# Altium PCB 智能实验室传感器底板.PcbDoc
Units mm, origin at the board's own origin, x right, y up, seen from the top; angles counter-clockwise.
Board outline 97 x 67 mm, 4 copper layers (Top Layer, Internal Plane 1, Internal Plane 2, Bottom Layer); 7 components, 11 nets, 52 pads, 0 vias.
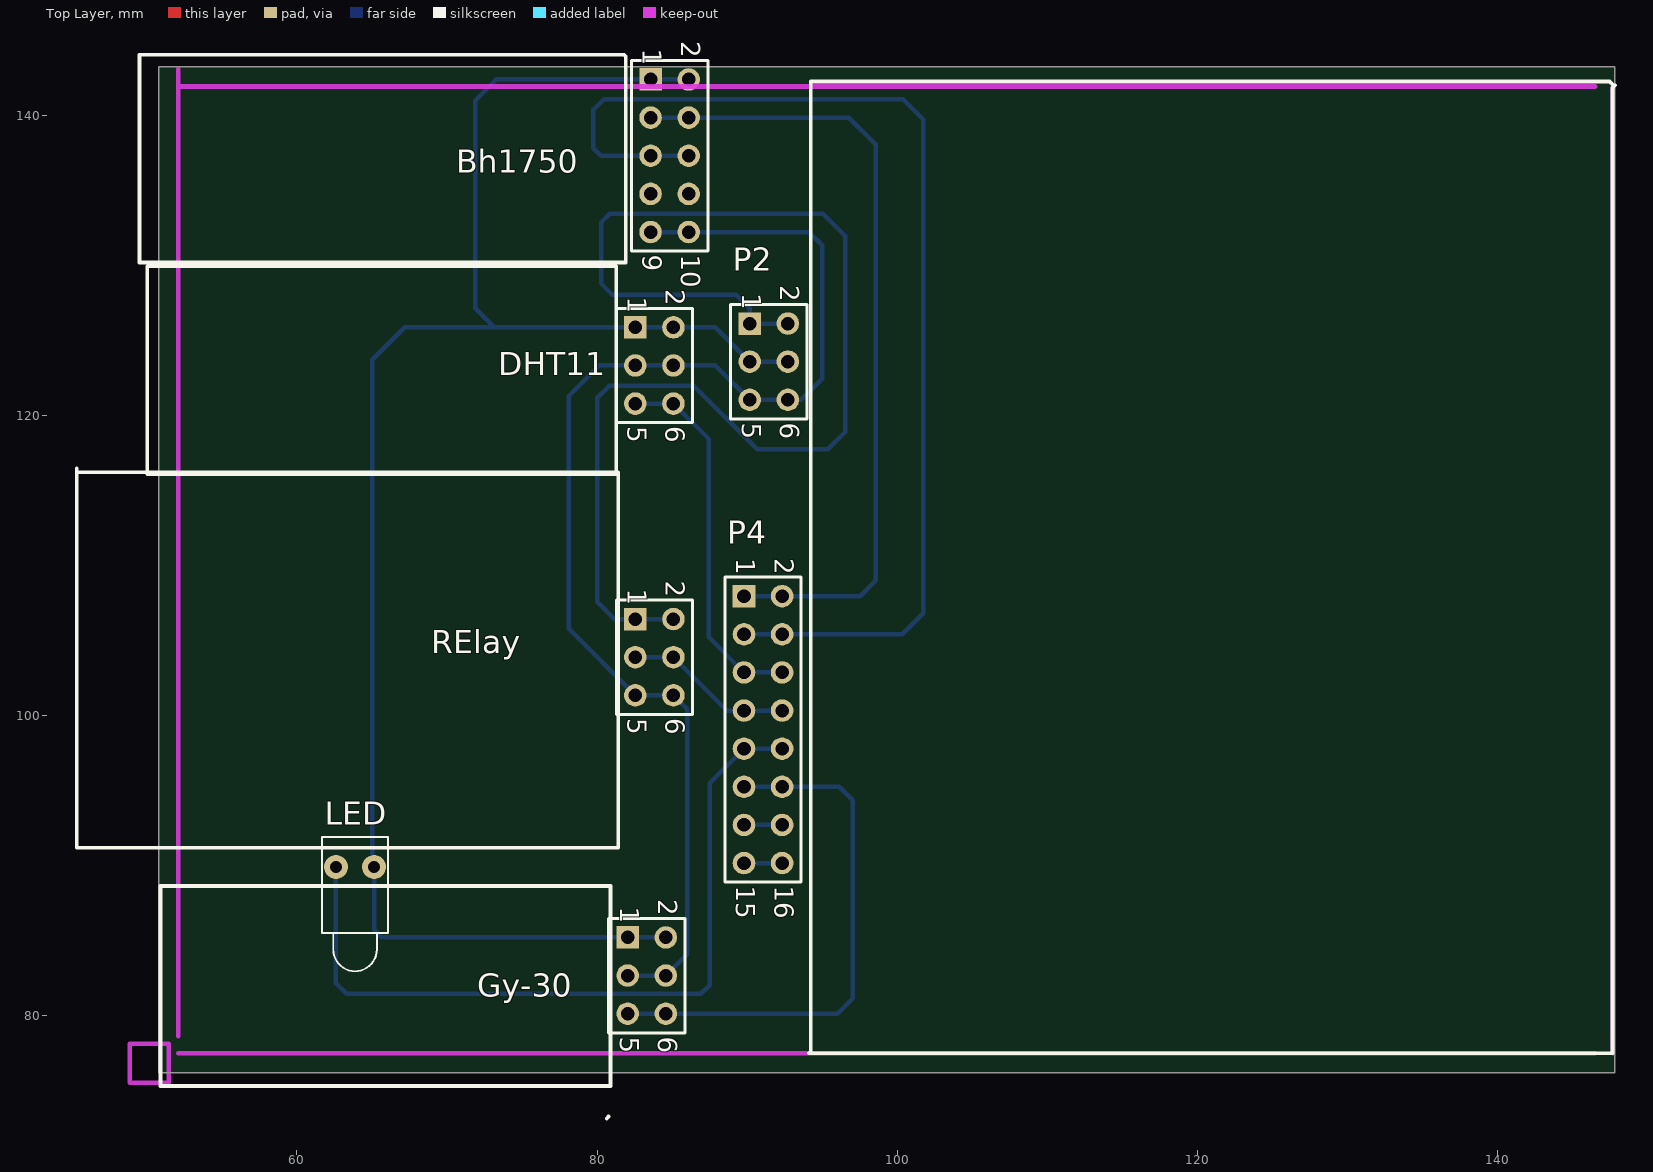
[diagram p0: Top Layer view]
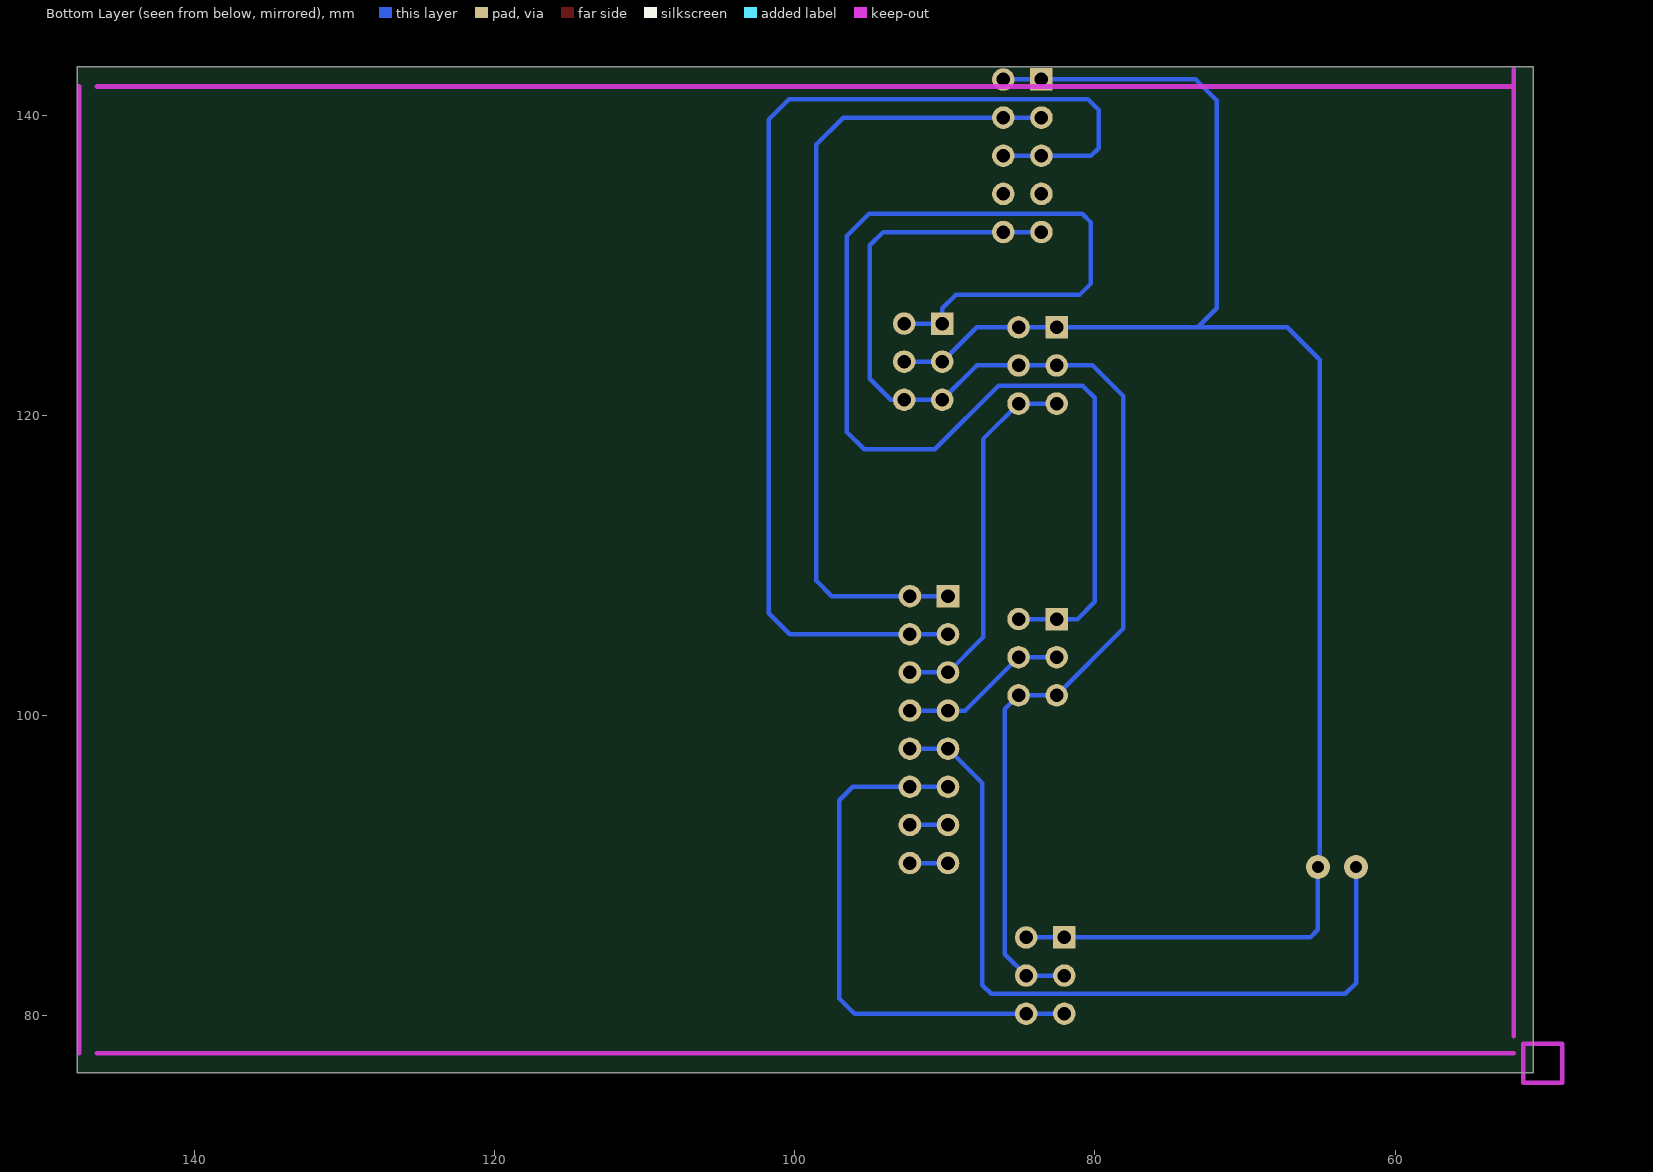
[diagram p1: Bottom Layer view, seen from below]
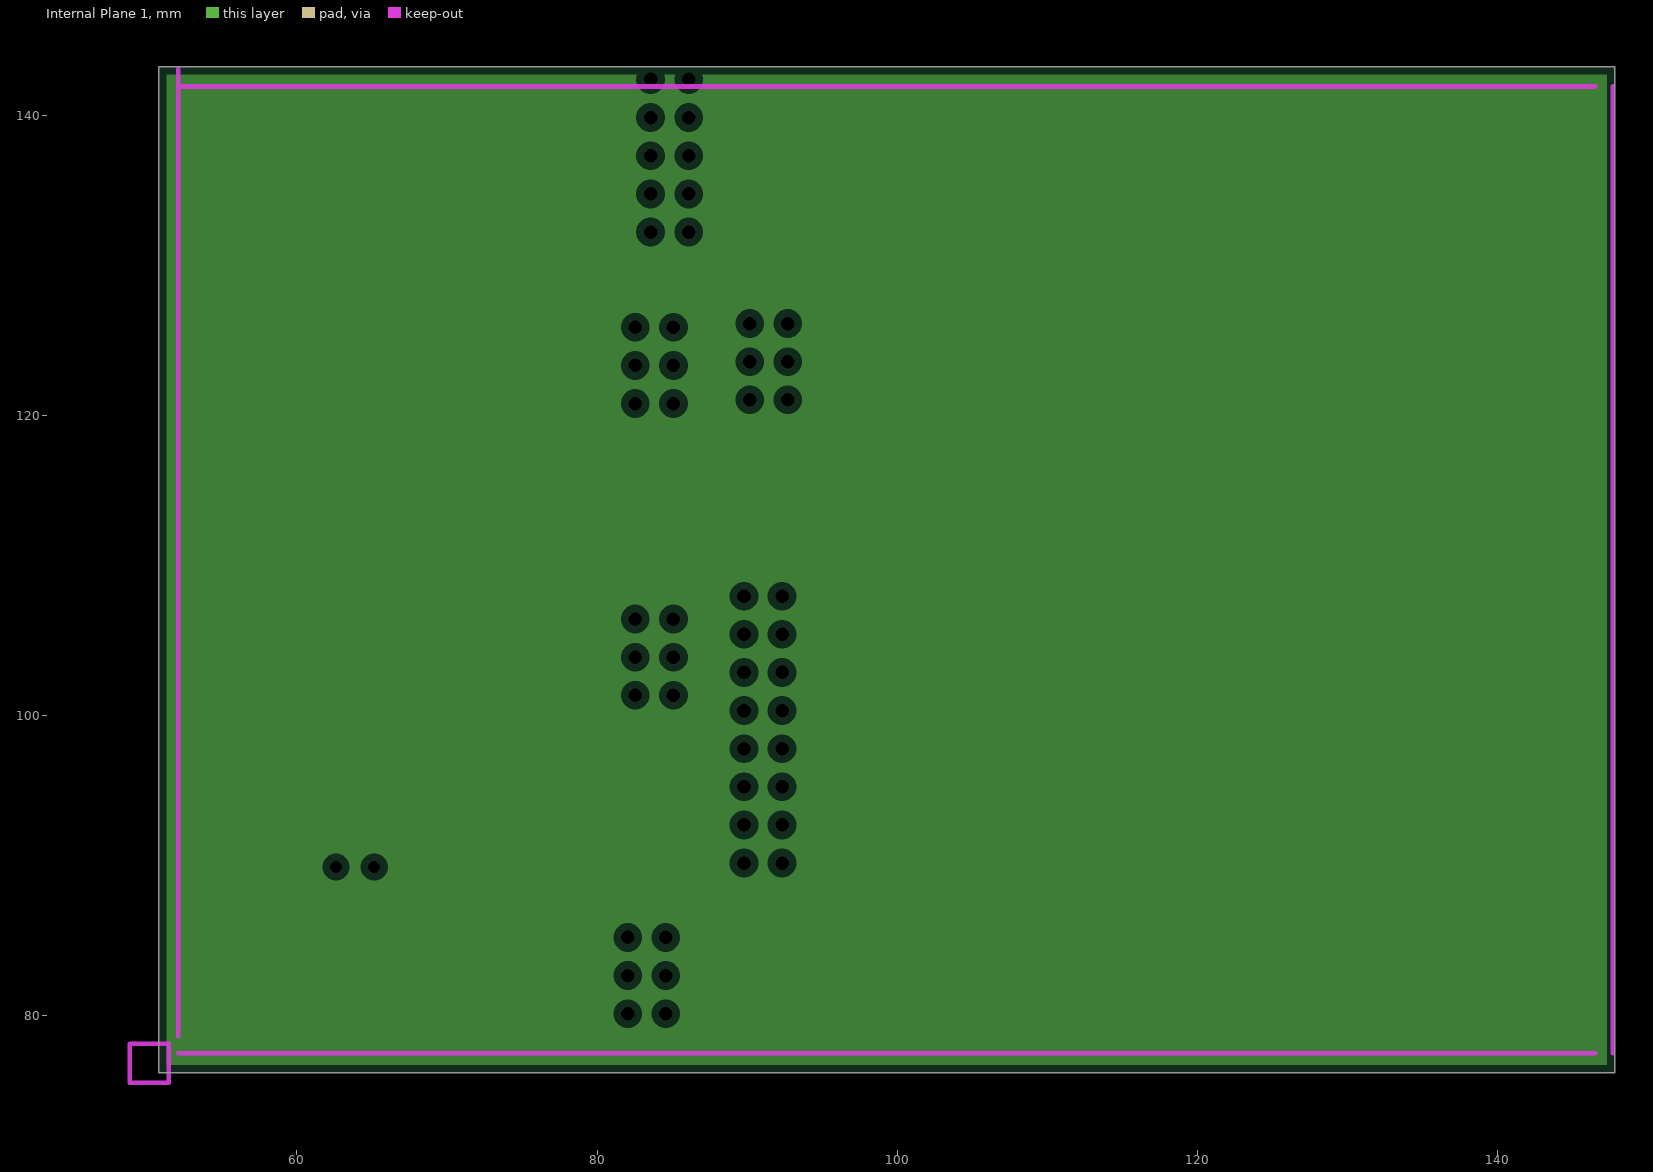
[diagram p2: Internal Plane 1, clearances drawn from the general rule]
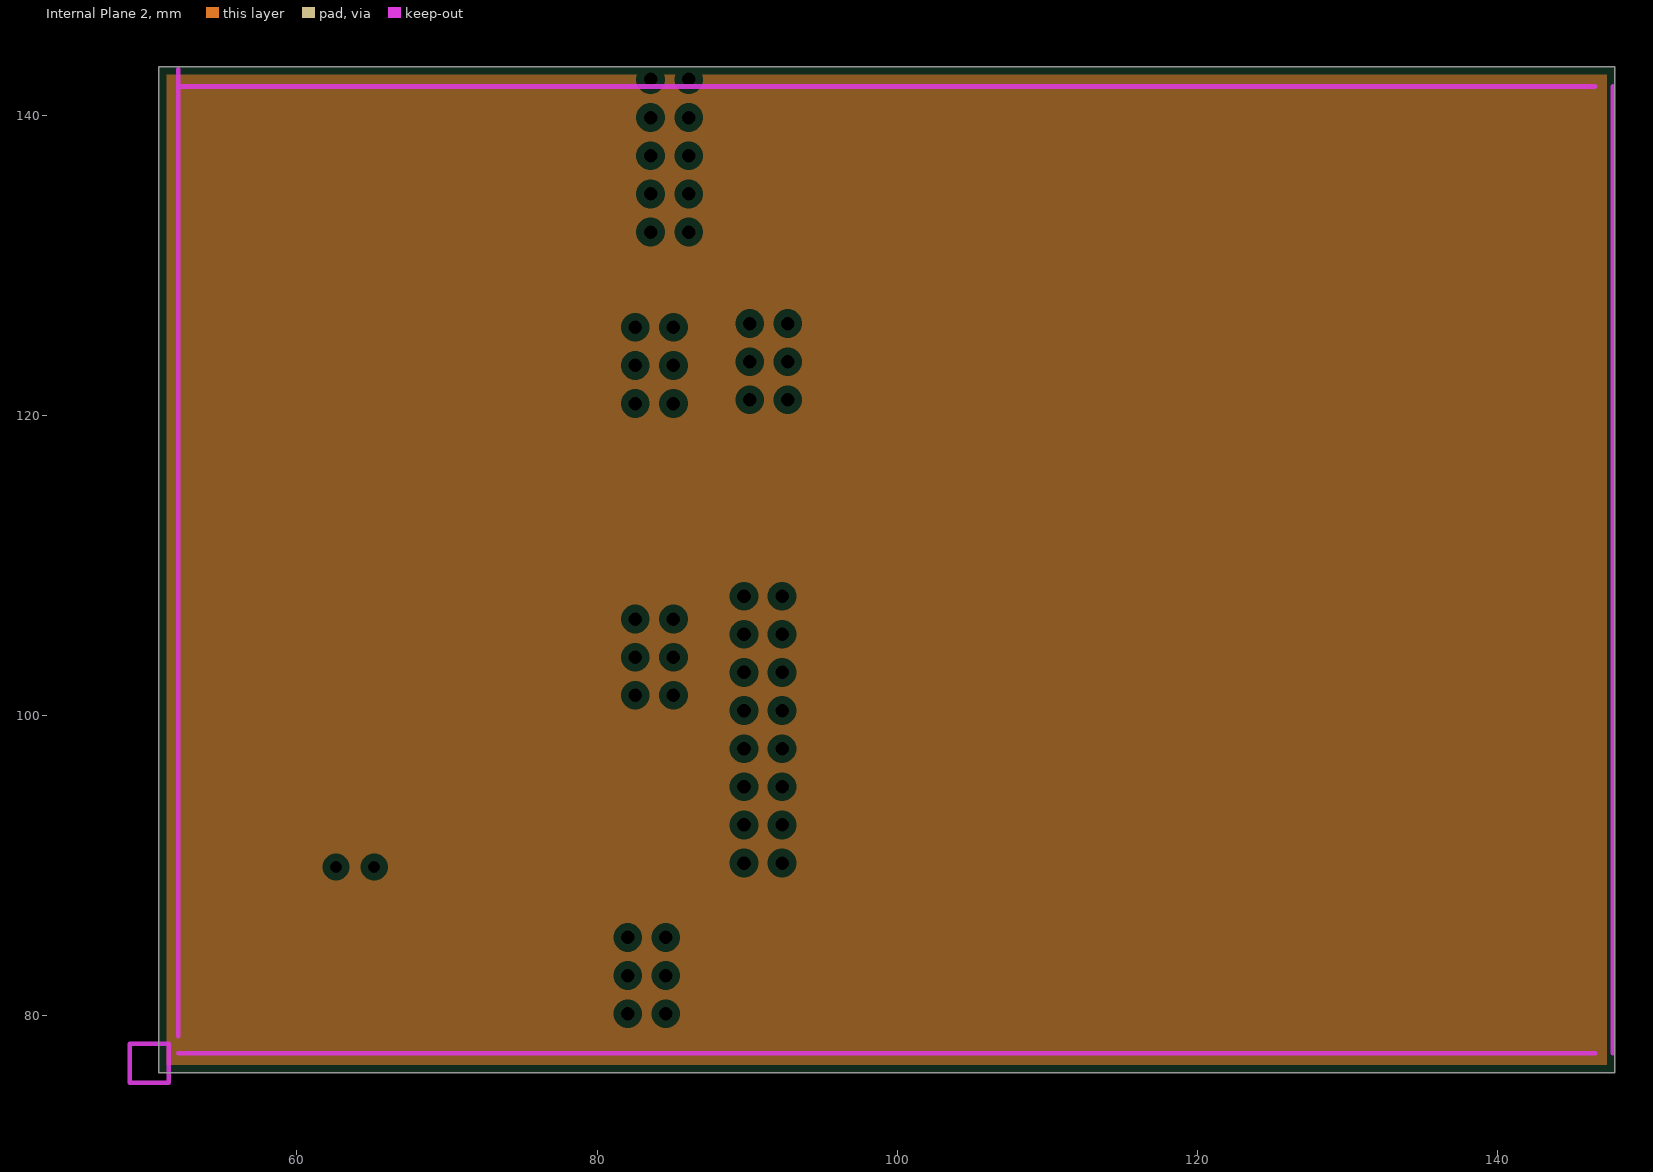
[diagram p3: Internal Plane 2, clearances drawn from the general rule]

## Layer stack, top to bottom
Top Layer: signal copper 0.0356
Dielectric: dielectric 0.32, FR-4, Dk 4.8
Internal Plane 1: plane copper 0.0356
Dielectric: dielectric 0.32, FR-4, Dk 4.8
Internal Plane 2: plane copper 0.0356
Dielectric: dielectric 0.32, FR-4, Dk 4.8
Bottom Layer: signal copper 0.0356

## Board outline
50.8,76.2 147.8,76.2 147.8,143.2 50.8,143.2

## Design rules (kind name [scope] priority, off if disabled: settings)
Clearance [All] p1: gap=0.3
PlaneClearance [All] p1: clearance=0.508
PlaneConnect [All] p1: planeconnectstyle=Relief reliefexpansion=0.508 reliefentries=4 reliefconductorwidth=0.254 reliefairgap=0.254
PolygonConnect [All] p1: connectstyle=Relief reliefconductorwidth=0.254 reliefentries=4 polygonreliefangle="90 Angle" airgapwidth=0.254
RoutingVias [All] p1: holewidth=0.8 width=1.6 viastyle="Through Hole" minholewidth=0.711 minwidth=1.27 maxholewidth=0.711 maxwidth=1.27
SolderMaskExpansion [All] p1: expansion=0.102
Width [All] p1: maxlimit=0.3 minlimit=0.3 preferedwidth=0.3
26 further rules are at their usual default settings.

## Components (designator, comment, footprint, x,y, rotation, side; value= is the part's Value field where it differs from the comment)
Bh1750 "Header 5X2" HDR2X5 83.566,142.367 r270 top
DHT11 "Header 3X2" HDR2X3 82.55,125.857 r270 top
Gy-30 "Header 3X2" HDR2X3 82.042,85.217 r270 top
LED "LED1" LED-1 63.881,89.916 r270 top
P2 "Header 3X2" HDR2X3 90.17,126.111 r270 top
P4 "Header 8X2" HDR2X8 89.789,107.95 r270 top
RElay "Header 3X2" HDR2X3 82.55,106.426 r270 top

## Footprints (in the part's own frame and the unit in brackets; to place one, negate y for a bottom-side part, rotate by r counter-clockwise, add the part's x,y. Pads: shape width x height; smd on the part's side, far side on the other; paste and mask are expansions set on the pad)
HDR2X3 [mm] "Connector; Header; 3x2 Position"
  rect 1.5x1.5 hole 0.9: 1(0,0)
  round 1.5 hole 0.9: 2(0,2.54) 3(2.54,0) 4(2.54,2.54) 5(5.08,0) 6(5.08,2.54)
  silkscreen extent -1.27,-1.27 6.35,3.81
HDR2X5 [mm] "Connector; Header; 5x2 Position"
  rect 1.5x1.5 hole 0.9: 1(0,0)
  round 1.5 hole 0.9: 2(0,2.54) 3(2.54,0) 4(2.54,2.54) 5(5.08,0) 6(5.08,2.54) 7(7.62,0) 8(7.62,2.54) 9(10.16,0) 10(10.16,2.54)
  silkscreen extent -1.27,-1.27 11.43,3.81
HDR2X8 [mm] "Connector; Header; 8x2 Position"
  rect 1.5x1.5 hole 0.9: 1(0,0)
  round 1.5 hole 0.9: 2(0,2.54) 3(2.54,0) 4(2.54,2.54) 5(5.08,0) 6(5.08,2.54) 7(7.62,0) 8(7.62,2.54) 9(10.16,0) 10(10.16,2.54) 11(12.7,0) 12(12.7,2.54) 13(15.24,0) 14(15.24,2.54) 15(17.78,0) 16(17.78,2.54)
  silkscreen extent -1.27,-1.27 19.05,3.81
LED-1 [mm] "LED; 2 Leads"
  round 1.6 hole 0.8: 1(0,1.27) 2(0,-1.27)
  silkscreen extent -2,-2.2 6.95,2.2

## Part data
Bh1750: "Header, 5-Pin, Dual row"
DHT11 Gy-30 P2 RElay: "Header, 3-Pin, Dual row"
LED: "Typical RED GaAs LED"
P4: "Header, 8-Pin, Dual row"

## Nets (pads, with @x,y where several pads share a name; then routed paths per layer and width w, separated by ;. In a path a pad name is that pad's centre, name@x,y a point inside that pad or via, vN(x,y) a via of type N, cw(c..) or ccw(c..) an arc to the next point about the centre after c; other vN are vias at no path point)
GND: Bh1750.9 Bh1750.10 DHT11.3 DHT11.4 Gy-30.3 Gy-30.4 P2.5 P2.6 RElay.5 RElay.6 | length 86.4
  Bottom Layer w0.3: Gy-30.3 Gy-30.4 86.004,84.099 86.004,100.432 RElay.6 RElay.5 78.105,105.791 78.105,121.285 80.137,123.317 DHT11.3 DHT11.4 87.884,123.317 P2.5 P2.6 93.599,121.031 94.996,122.428 94.996,131.318 94.107,132.207 Bh1750.10 Bh1750.9
P1_0: Bh1750.3 Bh1750.4 P4.1 P4.2 | length 54
  Bottom Layer w0.3: Bh1750.3 Bh1750.4 96.774,139.827 98.552,138.049 98.552,108.966 97.536,107.95 P4.2 P4.1
P1_1: Bh1750.5 Bh1750.6 P4.3 P4.4 | length 77.3
  Bottom Layer w0.3: Bh1750.6 Bh1750.5 80.264,137.287 79.756,137.795 79.756,140.335 80.467,141.046 100.381,141.046 101.727,139.7 101.727,106.807 100.33,105.41 P4.4 P4.3
P1_2: DHT11.5 DHT11.6 P4.5 P4.6 | length 24.9
  Bottom Layer w0.3: DHT11.5 DHT11.6 87.452,118.415 87.452,105.207 P4.5 P4.6
P1_3: P4.7 P4.8 RElay.3 RElay.4 | length 11.3
  Bottom Layer w0.3: RElay.3 RElay.4 88.646,100.33 P4.7 P4.8
P1_4: LED.2 P4.9 P4.10 | length 52.4
  Bottom Layer w0.3: LED.2 62.611,82.169 63.322,81.458 86.919,81.458 87.503,82.042 87.503,95.504 P4.9 P4.10
P1_5: Gy-30.5 Gy-30.6 P4.11 P4.12 | length 36.2
  Bottom Layer w0.3: Gy-30.5 Gy-30.6 96.012,80.137 97.028,81.153 97.028,94.361 96.139,95.25 P4.12 P4.11
P1_6: P4.13 P4.14 | length 2.5
  Bottom Layer w0.3: P4.13 P4.14
P1_7: P4.15 P4.16 | length 2.5
  Bottom Layer w0.3: P4.15 P4.16
VCC3.3: Bh1750.1 Bh1750.2 DHT11.1 DHT11.2 Gy-30.1 Gy-30.2 LED.1 P2.3 P2.4 | length 128.5
  Bottom Layer w0.3: LED.1@65.024,89.916 65.024,123.698 67.183,125.857 DHT11.1 DHT11.2 87.884,125.857 P2.3 P2.4 ; LED.1 65.151,85.725 65.659,85.217 Gy-30.1 ; 71.12,85.217 Gy-30.1 ; 73.152,125.857 71.882,127.127 71.882,140.97 73.279,142.367 Bh1750.1 Bh1750.2 ; Gy-30.2 Gy-30.1
VCC5: P2.1 P2.2 RElay.1 RElay.2 | length 89.2
  Bottom Layer w0.3: RElay.1 RElay.2 81.153,106.426 80.01,107.569 80.01,121.158 80.829,121.977 86.43,121.977 90.678,117.729 95.377,117.729 96.52,118.872 96.52,131.953 95.047,133.426 80.848,133.426 80.264,132.842 80.264,128.778 81.026,128.016 89.281,128.016 90.17,127.127 P2.1 P2.2
pads on no net: Bh1750.7 Bh1750.8

## Polygon pours and split planes (outlines as drawn)
no net on Internal Plane 1 (split plane): 147.8,76.2 50.8,76.2 50.8,143.2 147.8,143.2
no net on Internal Plane 2 (split plane): 147.8,76.2 50.8,76.2 50.8,143.2 147.8,143.2

## Keep-outs
Keep-Out Layer:
  lines w0.3: 52.1,77.5 146.5,77.5 ; 52.1,78.643 52.1,143.043 ; 52.1,141.9 146.5,141.9 ; 147.643,77.5 147.643,141.9 ; 48.865,75.535 51.465,75.535 51.465,78.135 48.865,78.135 48.865,75.535

## Silkscreen, mask and mechanical layers (free items; w line width, h text height)
Top Overlay:
  lines w0.254: 45.339,116.459 45.339,91.186 81.407,91.186 81.407,116.205 45.466,116.205 ; 50.292,116.205 50.419,116.078 ; 80.645,73.152 80.772,73.279 ; 49.53,130.175 49.53,144.018 81.788,144.018 81.915,143.891 81.915,130.175 49.53,130.175 ; 50.038,116.078 50.038,129.921 81.28,129.921 81.28,116.078 50.038,116.078 ; 50.927,75.311 80.899,75.311 80.899,88.646 50.927,88.646 50.927,75.311 ; 94.107,77.5 94.234,77.627 94.234,142.24 147.447,142.24 147.701,141.986 147.828,141.986 147.643,141.801 147.643,77.5 94.107,77.5

## Dimensions
50.8,76.2 to 52.1,77.5 on Mechanical 1
50.8,76.2 to 52.1,78.643 on Mechanical 1

## Text inside footprints (layer, text, board x,y; h text height)
Bh1750: Top Overlay "2" at 85.598,144.907 h1.27 r270; Top Overlay "1" at 83.058,144.399 h1.27 r270; Top Overlay "9" at 83.058,130.683 h1.27 r270; Top Overlay "10" at 85.598,130.683 h1.27 r270
DHT11: Top Overlay "1" at 82.042,127.889 h1.27 r270; Top Overlay "2" at 84.582,128.397 h1.27 r270; Top Overlay "5" at 82.042,119.253 h1.27 r270; Top Overlay "6" at 84.582,119.253 h1.27 r270
Gy-30: Top Overlay "1" at 81.534,87.249 h1.27 r270; Top Overlay "2" at 84.074,87.757 h1.27 r270; Top Overlay "5" at 81.534,78.613 h1.27 r270; Top Overlay "6" at 84.074,78.613 h1.27 r270
P2: Top Overlay "1" at 89.662,128.143 h1.27 r270; Top Overlay "2" at 92.202,128.651 h1.27 r270; Top Overlay "5" at 89.662,119.507 h1.27 r270; Top Overlay "6" at 92.202,119.507 h1.27 r270
P4: Top Overlay "16" at 91.821,88.646 h1.27 r270; Top Overlay "15" at 89.281,88.646 h1.27 r270; Top Overlay "1" at 89.281,110.49 h1.27 r270; Top Overlay "2" at 91.821,110.49 h1.27 r270
RElay: Top Overlay "1" at 82.042,108.458 h1.27 r270; Top Overlay "2" at 84.582,108.966 h1.27 r270; Top Overlay "5" at 82.042,99.822 h1.27 r270; Top Overlay "6" at 84.582,99.822 h1.27 r270